# Altium PCB PCB1.PcbDoc
Units mm, origin at the board's own origin, x right, y up, seen from the top; angles counter-clockwise.
Board outline 200 x 100 mm, 2 copper layers (Top Layer, Bottom Layer); 106 components, 53 nets, 297 pads, 37 vias.
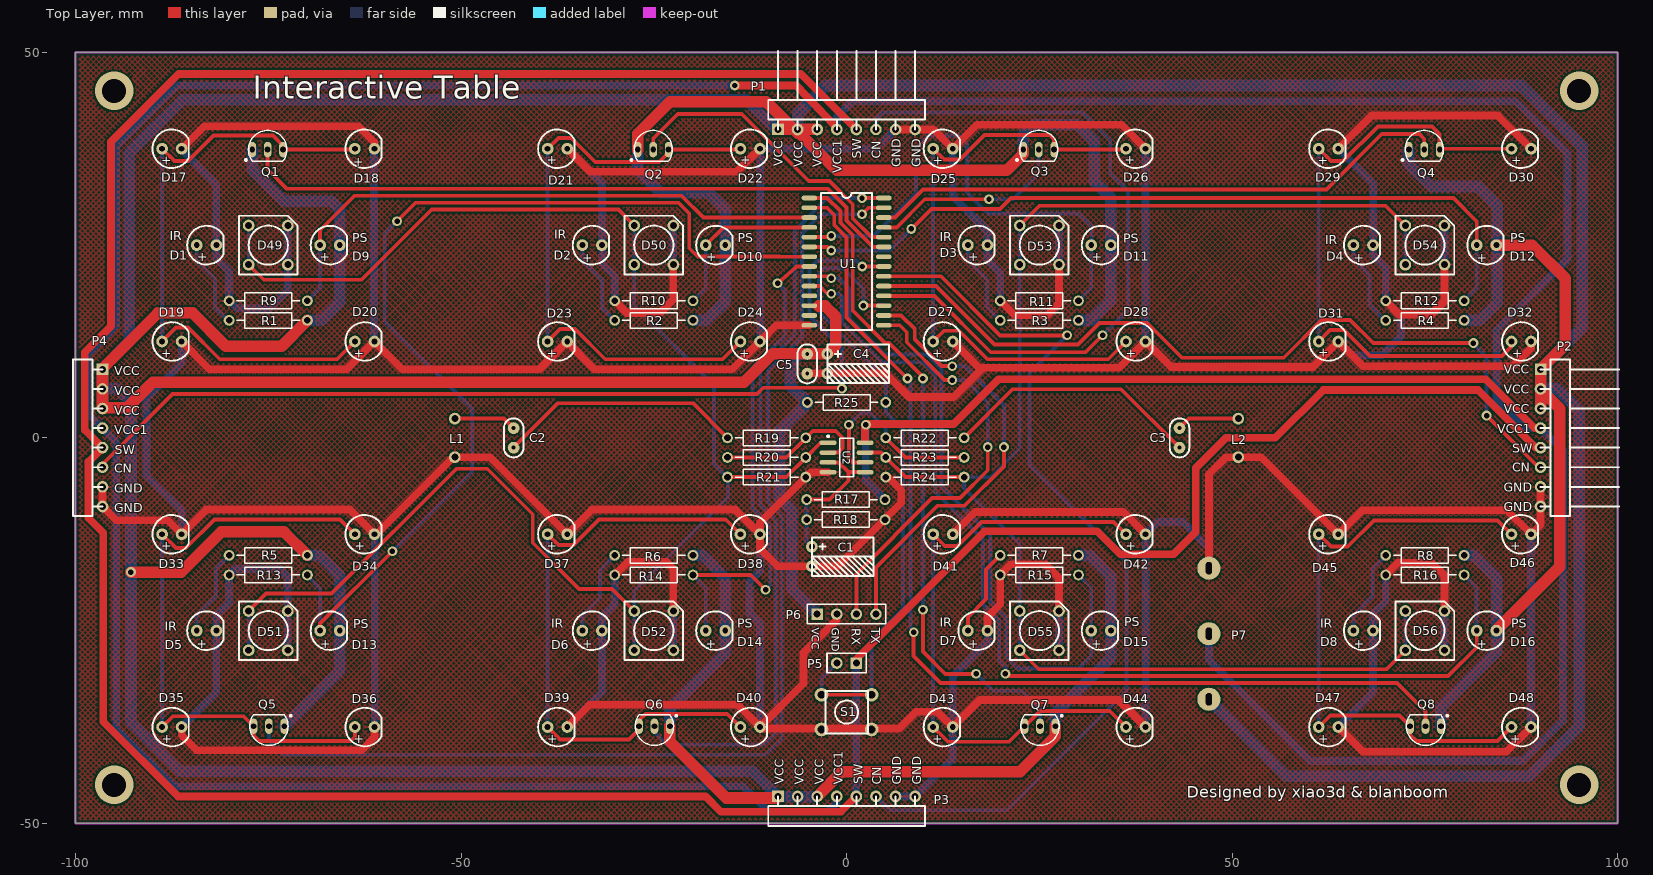
[diagram p0: Top Layer view]
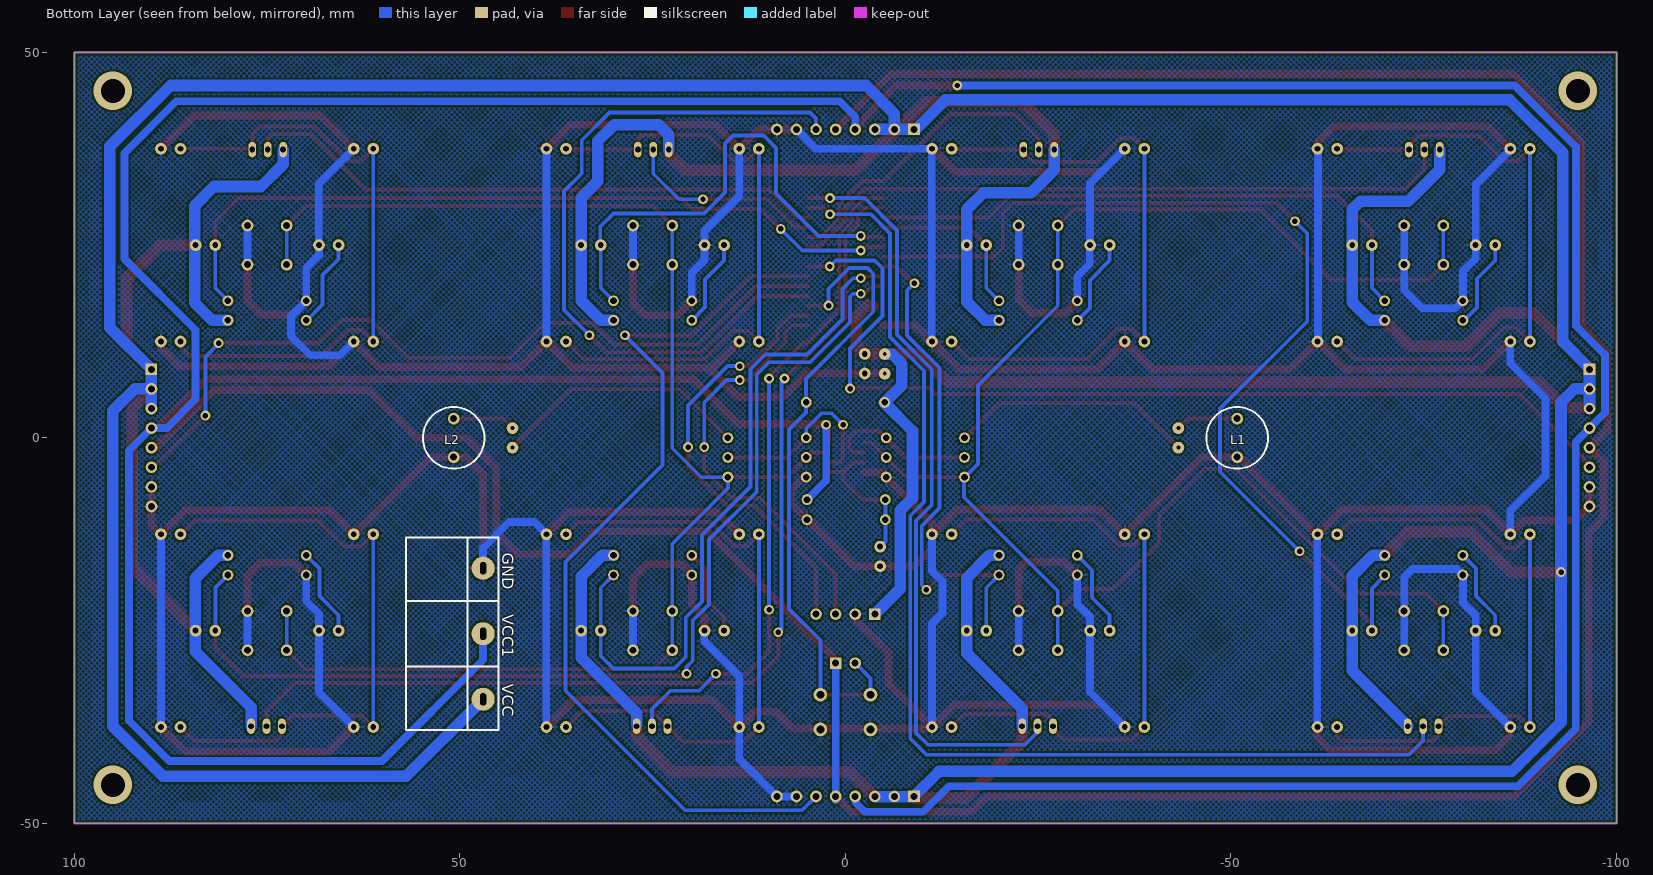
[diagram p1: Bottom Layer view, seen from below]

## Layer stack, top to bottom
Top Layer: signal copper 0.0356
Dielectric: dielectric 0.32, FR-4, Dk 4.8
Bottom Layer: signal copper 0.0356

## Board outline
-100,50 100,50 100,-50 -100,-50 -100,50

## Design rules (kind name [scope] priority, off if disabled: settings)
Clearance [All] p1: gap=0.254
PolygonConnect [All] p1: connectstyle=Relief reliefconductorwidth=0.254 reliefentries=4 polygonreliefangle="90 Angle"
RoutingVias [All] p1: holewidth=0.711 width=1.27 viastyle="Through Hole" minholewidth=0.711 minwidth=1.27 maxholewidth=0.711 maxwidth=1.27
SilkToSilkClearance [All] p1: silktosilkclearance=0
SilkscreenOverComponentPads [All] p1: minsilkscreentomaskgap=0
SolderMaskExpansion [All] p1: expansion=0.102
Width SW [InNet('SW')] p1: maxlimit=1 minlimit=1 preferedwidth=1
Width GND [InNet('GND')] p2: maxlimit=1 minlimit=1 preferedwidth=1
Width VCC1 [InNet('VCC1')] p3: maxlimit=1 minlimit=1 preferedwidth=1
Width VCC [InNet('VCC')] p4: maxlimit=1.5 minlimit=1.5 preferedwidth=1.5
Width [All] p5: maxlimit=0.5 minlimit=0.5 preferedwidth=0.5
26 further rules are at their usual default settings.

## Components (designator, comment, footprint, x,y, rotation, side; value= is the part's Value field where it differs from the comment)
C1 "Cap Pol1" "IECP10 W" -4.5,-15.4 r90 top
C2 "Cap" iCap -43.18,0 r270 top
C3 "Cap" iCap 43.18,0 r270 top
C4 "Cap Pol1" "IECP10 W" -2.5,9.6 r90 top
C5 "Cap" iCap -5.1,9.6 r90 top
D1 "LED0" iLED_IR -83,25 r0 top
D2 "LED0" iLED_IR -33,25 r0 top
D3 "LED0" iLED_IR 17,25 r0 top
D4 "LED0" iLED_IR 67,25 r0 top
D5 "LED0" iLED_IR -83,-25 r0 top
D6 "LED0" iLED_IR -33,-25 r0 top
D7 "LED0" iLED_IR 17,-25 r0 top
D8 "LED0" iLED_IR 67,-25 r0 top
D9 "Photo Sen" iLED_PS -67,25 r0 top
D10 "Photo Sen" iLED_PS -17,25 r0 top
D11 "Photo Sen" iLED_PS 33,25 r0 top
D12 "Photo Sen" iLED_PS 83,25 r0 top
D13 "Photo Sen" iLED_PS -67,-25 r0 top
D14 "Photo Sen" iLED_PS -17,-25 r0 top
D15 "Photo Sen" iLED_PS 33,-25 r0 top
D16 "Photo Sen" iLED_PS 83,-25 r0 top
D17 "LED0" iLED -87.5,37.5 r0 top
D18 "LED0" iLED -62.5,37.5 r0 top
D19 "LED0" iLED -87.5,12.5 r0 top
D20 "LED0" iLED -62.5,12.5 r0 top
D21 "LED0" iLED -37.5,37.5 r0 top
D22 "LED0" iLED -12.5,37.5 r0 top
D23 "LED0" iLED -37.5,12.5 r0 top
D24 "LED0" iLED -12.5,12.5 r0 top
D25 "LED0" iLED 12.5,37.5 r0 top
D26 "LED0" iLED 37.5,37.5 r0 top
D27 "LED0" iLED 12.5,12.5 r0 top
D28 "LED0" iLED 37.5,12.5 r0 top
D29 "LED0" iLED 62.5,37.5 r0 top
D30 "LED0" iLED 87.5,37.5 r0 top
D31 "LED0" iLED 62.5,12.5 r0 top
D32 "LED0" iLED 87.5,12.5 r0 top
D33 "LED0" iLED -87.5,-12.5 r0 top
D34 "LED0" iLED -62.5,-12.5 r0 top
D35 "LED0" iLED -87.5,-37.5 r0 top
D36 "LED0" iLED -62.5,-37.5 r0 top
D37 "LED0" iLED -37.5,-12.5 r0 top
D38 "LED0" iLED -12.5,-12.5 r0 top
D39 "LED0" iLED -37.5,-37.5 r0 top
D40 "LED0" iLED -12.5,-37.5 r0 top
D41 "LED0" iLED 12.5,-12.5 r0 top
D42 "LED0" iLED 37.5,-12.5 r0 top
D43 "LED0" iLED 12.5,-37.5 r0 top
D44 "LED0" iLED 37.5,-37.5 r0 top
D45 "LED0" iLED 62.5,-12.5 r0 top
D46 "LED0" iLED 87.5,-12.5 r0 top
D47 "LED0" iLED 62.5,-37.5 r0 top
D48 "LED0" iLED 87.5,-37.5 r0 top
D49 "led4" LED4 -75,25 r0 top
D50 "led4" LED4 -25,25 r0 top
D51 "led4" LED4 -75,-25 r0 top
D52 "led4" LED4 -25,-25 r0 top
D53 "led4" LED4 25,25 r0 top
D54 "led4" LED4 75,25 r0 top
D55 "led4" LED4 25,-25 r0 top
D56 "led4" LED4 75,-25 r0 top
L1 "Inductor" IL -50.8,0 r90 top
L2 "Inductor" IL 50.8,0 r90 top
P1 "Header 8" HDR1X8H 0,40 r90 top
P2 "Header 8" HDR1X8H 90,0 r0 top
P3 "Header 8" HDR1X8 0,-46.5 r90 top
P4 "Header 8" HDR1X8 -96.5,0 r0 top
P5 "Header 2" HDR1X2 1.27,-29.21 r180 top
P6 "Header 4" HDR1X4 -3.81,-22.86 r0 top
P7 "Header 3" HBX3P 46.99,-25.4 r90 top
Q1 "NPN" NPN -75,37.5 r270 top
Q2 "NPN" NPN -25,37.5 r270 top
Q3 "NPN" NPN 25,37.5 r270 top
Q4 "NPN" NPN 75,37.5 r270 top
Q5 "NPN" NPN -75,-37.5 r90 top
Q6 "NPN" NPN -25,-37.5 r90 top
Q7 "NPN" NPN 25,-37.5 r90 top
Q8 "NPN" NPN 75,-37.5 r90 top
R1 "Res2" AXIAL-0.4 -75,15.24 r0 top
R2 "Res2" AXIAL-0.4 -25,15.24 r0 top
R3 "Res2" AXIAL-0.4 25,15.24 r0 top
R4 "Res2" AXIAL-0.4 75,15.24 r0 top
R5 "Res2" AXIAL-0.4 -75,-15.24 r0 top
R6 "Res2" AXIAL-0.4 -25,-15.24 r0 top
R7 "Res2" AXIAL-0.4 25,-15.24 r0 top
R8 "Res2" AXIAL-0.4 75,-15.24 r0 top
R9 "Res2" AXIAL-0.4 -75,17.78 r0 top
R10 "Res2" AXIAL-0.4 -25,17.78 r0 top
R11 "Res2" AXIAL-0.4 25,17.78 r0 top
R12 "Res2" AXIAL-0.4 75,17.78 r0 top
R13 "Res2" AXIAL-0.4 -75,-17.78 r0 top
R14 "Res2" AXIAL-0.4 -25,-17.78 r0 top
R15 "Res2" AXIAL-0.4 25,-17.78 r0 top
R16 "Res2" AXIAL-0.4 75,-17.78 r0 top
R17 "Res2" AXIAL-0.4 -0.1,-8 r0 top
R18 "Res2" AXIAL-0.4 -0.1,-10.6 r0 top
R19 "Res2" AXIAL-0.4 -10.36,0 r180 top
R20 "Res2" AXIAL-0.4 -10.36,-2.54 r180 top
R21 "Res2" AXIAL-0.4 -10.36,-5.08 r180 top
R22 "Res2" AXIAL-0.4 10.16,0 r180 top
R23 "Res2" AXIAL-0.4 10.16,-2.54 r180 top
R24 "Res2" AXIAL-0.4 10.16,-5.08 r180 top
R25 "Res2" AXIAL-0.4 0,4.6 r180 top
S1 "SW" SW 0,-35.56 r180 top
U1 "STC15F408AD - 35I - SOP28" SOP28 0,22.86 r0 top
U2 "LM358M" M08A_N 0,-2.54 r0 top

## Footprints (in the part's own frame and the unit in brackets; to place one, negate y for a bottom-side part, rotate by r counter-clockwise, add the part's x,y. Pads: shape width x height; smd on the part's side, far side on the other; paste and mask are expansions set on the pad)
AXIAL-0.4 [mm] "Axial Device, Thru-Hole; 2 Leads; 0.4 in Pin Spacing"
  round 1.4 hole 0.85: 1(-5.08,0) 2(5.08,0)
  silkscreen extent -4.06,-1.02 4.06,1.02
HBX3P [mm]
  round 3 hole 0.8 slot 1.6 at 0 deg: 1(-8.5,0) 2(0,0) 3(8.5,0)
HDR1X2 [mm] "Connector; Header; 2 Position"
  rect 1.5x1.5 hole 0.9: 1(0,0)
  round 1.5 hole 0.9: 2(2.54,0)
  silkscreen extent -1.27,-1.27 3.81,1.27
HDR1X4 [mm] "Connector; Header; 4 Position"
  rect 1.5x1.5 hole 0.9: 1(0,0)
  round 1.5 hole 0.9: 2(2.54,0) 3(5.08,0) 4(7.62,0)
  silkscreen extent -1.27,-1.27 8.89,1.27
HDR1X8 [mm]
  rect 1.5x1.5 hole 0.9: 1(0,8.89)
  round 1.5 hole 0.9: 2(0,6.35) 3(0,3.81)
  round 1.524 hole 0.9: 4(0,1.27) 5(0,-1.27) 6(0,-3.81) 7(0,-6.35) 8(0,-8.89)
  silkscreen extent -3.81,-10.16 0,10.16
HDR1X8H [mm]
  rect 1.5x1.5 hole 0.9: 1(0,8.89)
  round 1.524 hole 0.9: 2(0,6.35) 3(0,3.81) 4(0,1.27) 5(0,-1.27) 8(0,-8.89)
  round 1.5 hole 0.9: 6(0,-3.81) 7(0,-6.35)
  silkscreen extent 0,-10.15 10.16,10.16
iCap [mil]
  round 60 hole 19.68: 1(-50,0) 2(50,0)
  silkscreen extent -100,-50 100,50
"IECP10 W" [mil]
  round 60 hole 30: 1(50.79,0) 2(-49.21,0)
  silkscreen extent -98,-315 98,0
IL [mm]
  round 1.524 hole 0.9: 1(-2.5,0) 2(2.5,0)
iLED [mil]
  round 60 hole 30: 1(-50,0) 2(50,0)
  silkscreen extent -98,-98 86,98
iLED_IR [mil]
  round 60 hole 30: 1(-50,0) 2(50,0)
  silkscreen extent -99,-99 86,99
iLED_PS [mil]
  round 60 hole 30: 1(-50,0) 2(50,0)
  silkscreen extent -98,-98 86,98
LED4 [mil]
  round 60 hole 35.43: 1(-100,100) 2(-100,-100) 3(100,100) 4(100,-100)
  silkscreen extent -150,-150 150,150
M08A_N [mm] "SOIC, 8-Leads, Body 4.9x3.9mm, Pitch 1.27mm, IPC Medium Density"
  oval 2.2x0.6 smd: 1(-2.4,1.905) 2(-2.4,0.635) 3(-2.4,-0.635) 4(-2.4,-1.905) 5(2.4,-1.905) 6(2.4,-0.635) 7(2.4,0.635) 8(2.4,1.905)
  silkscreen extent -2.52,-2.5 0.9,2.88, body extent -2,-2.5 2,2.5, height 1.75
NPN [mm]
  oval 2x1 hole 0.76: 1(0.11,-2.08) 2(0.11,-0.08) 3(0.11,1.92)
  silkscreen extent -2.37,-3.03 1.61,2.4, body extent -2.39,-2.58 1.61,2.42, height 6.86
SOP28 [mil] "STC"
  oval 80x24 smd: 1(-190,325) 2(-190,275) 3(-190,225) 4(-190,175) 5(-190,125) 6(-190,75) 7(-190,25) 8(-190,-25) 9(-190,-75) 10(-190,-125) 11(-190,-175) 12(-190,-225) 13(-190,-275) 14(-190,-325) 15(190,-325) 16(190,-275) 17(190,-225) 18(190,-175) 19(190,-125) 20(190,-75) 21(190,-25) 22(190,25) 23(190,75) 24(190,125) 25(190,175) 26(190,225) 27(190,275) 28(190,325)
  silkscreen extent -130,-350 130,350
SW [mil]
  round 70 hole 40: 1(-127.95,88.58) 1(127.95,88.58) 2(-127.95,-88.58) 2(127.95,-88.58)
  silkscreen extent -108,-108 108,108

## Part data
C1 C4: "Polarized Capacitor (Radial)"
C2 C3 C5: "Capacitor"
D1 D2 D3 D4 D5 D6 D7 D8 D17 D18 D19 D20 D21 D22 D23 D24 D25 D26 D27 D28 D29 D30 D31 D32 D33 D34 D35 D36 D37 D38 D39 D40 D41 D42 D43 D44 D45 D46 D47 D48: "Typical INFRARED GaAs LED"
D9 D10 D11 D12 D13 D14 D15 D16: "Photosensitive Diode"
P1 P2 P3 P4: "Header, 8-Pin"
P5: "Header, 2-Pin"
P6: "Header, 4-Pin"
P7: "Header, 3-Pin"
Q1 Q2 Q3 Q4 Q5 Q6 Q7 Q8: "NPN Bipolar Transistor"
R1 R2 R3 R4 R5 R6 R7 R8 R9 R10 R11 R12 R13 R14 R15 R16 R17 R18 R19 R20 R21 R22 R23 R24 R25: "Resistor"
S1: library part 微动开关
U2: "Low Power Dual Operational Amplifier"

## Via types
v1: diameter 1.27, hole 0.711, Top Layer to Bottom Layer, 33 vias
v2: diameter 5, hole 3.1, Top Layer to Bottom Layer, 4 vias

## Nets (pads, with @x,y where several pads share a name; then routed paths per layer and width w, separated by ;. In a path a pad name is that pad's centre, name@x,y a point inside that pad or via, vN(x,y) a via of type N, cw(c..) or ccw(c..) an arc to the next point about the centre after c; other vN are vias at no path point)
GND: C1.2 C4.2 C5.1 D1.2 D2.2 D3.2 D4.2 D5.2 D6.2 D7.2 D8.2 D17.2 D18.2 D19.2 D20.2 D21.2 D22.2 D23.2 D24.2 D25.2 D26.2 D27.2 D28.2 D29.2 D30.2 D31.2 D32.2 D33.2 D34.2 D35.2 D36.2 D37.2 D38.2 D39.2 D40.2 D41.2 D42.2 D43.2 D44.2 D45.2 D46.2 D47.2 D48.2 D49.3 D49.4 D50.3 D50.4 D51.3 D51.4 D52.3 D52.4 D53.3 D53.4 D54.3 D54.4 D55.3 D55.4 D56.3 D56.4 L1.1 L2.1 P1.7 P1.8 P2.7 P2.8 P3.7 P3.8 P4.7 P4.8 P6.2 P7.3 R9.1 R10.1 R11.1 R12.1 R13.1 R14.1 R15.1 R16.1 R18.2 R21.1 R24.2 S1.1 U1.14 U2.4 | length 1310
  Top Layer w1: P4.7 P4.8 -94.69,-10.7 -88.03,-10.7 D33.2 -83.03,-9.3 -64.4,-9.3 -61.23,-12.47 D34.2 -61.115,-12.615 -51,-2.5 L1.1 -46.23,-2.5 D37.2 -33.03,-9.3 -14.43,-9.3 D38.2 ; D35.2 -86.23,-38.57 -84.3,-40.5 -62.9,-40.5 -61.23,-38.83 D36.2 ; D19.2 -82.63,8.9 -64.83,8.9 D20.2 -57.63,8.9 -39.83,8.9 D23.2 -36.23,12.43 -32.7,8.9 -14.83,8.9 D24.2 -9.125,14.605 U1.14 ; D17.2 -86.2,37.5 -83.3,40.4 -63.3,40.4 -61.23,38.33 D18.2 ; D39.2 -33.33,-34.6 -14.13,-34.6 D40.2 ; D21.2 -33.23,34.5 -14.23,34.5 D22.2 ; R14.1 -28.4,-16.1 -23.32,-16.1 -22.46,-16.96 D52.3 ; R10.1 -28.5,16.2 -24.2,16.2 -22.46,17.94 D50.4 ; C5.1@-5.1,8.4 5,8.4 8.1,5.3 13.9,5.3 17.435,8.835 ; U2.4 -4.645,-4.445 R21.1 -11.23,-11.03 D38.2 ; P6.2 -1.27,-23.57 -5.6,-27.9 -5.6,-31.87 D40.2 ; R24.2 5.38,-5.08 7.1,-6.8 7.1,-8.4 -1.15,-16.65 C1.2 -8.95,-16.65 -11.23,-14.37 D38.2 ; P1.7 P1.8 11.27,40 D25.2 16.87,40.6 35.67,40.6 D26.2 ; D41.2 16.67,-9.6 35.87,-9.6 D42.2 ; D27.2 17.17,9.1 35.37,9.1 D28.2 42.07,9.2 60.5,9.2 63.77,12.47 D31.2 66.97,9.3 86.4,9.3 88.77,11.67 D32.2 ; D7.2 18.27,-23.23 19.92,-21.58 R15.1 21.3,-16.4 25.8,-16.4 27.54,-18.14 D55.3 ; R11.1 21.8,15.9 26,15.9 27.54,17.44 D53.4 ; D44.2 35.27,-34 17.27,-34 D43.2 11.77,-35.5 9,-35.5 6.8,-37.7 -11.03,-37.7 D40.2 ; P7.3@46.99,-17.11 46.99,-4.71 49.2,-2.5 53.77,-2.5 D45.2 66.9,-9.37 85.64,-9.37 D46.2 90,-11.27 P2.8 P2.7 ; D47.2 66.97,-40.7 85.57,-40.7 D48.2 ; D29.2 68.07,41.8 84.47,41.8 D30.2 ; R16.1 71.5,-16.2 75.9,-16.2 77.54,-17.84 D56.3 ; R12.1 71.7,16 75.8,16 77.54,17.74 D54.4
  Bottom Layer w1: D17.2@-86.3,37.43 -81.73,32.86 D1.2 -81.73,23.23 -80.08,21.58 R9.1 -79.1,16.8 -74.8,16.8 -72.46,19.14 D49.4 D49.3 ; D35.2 -81.73,-33 -81.73,-23.03 -80.08,-21.38 R13.1 -79.3,-17 -73.5,-17 -72.46,-18.04 D51.3 D51.4 ; D33.2 -86.23,-9.47 -90.8,-4.9 -90.8,-4.5 -90.8,5.1 -86.23,9.67 D19.2 ; D36.2 -61.2,-37.47 -61.2,-12.53 D34.2 ; D20.2 -61.3,12.57 -61.3,37.43 D18.2 ; D39.2 -31.73,-33 -31.73,-23.23 -30.08,-21.58 R14.1 ; D21.2 -31.73,33 D2.2 ; D2.2@-31.7,24.8 -31.7,22.6 -30.08,20.98 R10.1 ; D52.4 D52.3 ; D50.4 D50.3 ; D40.2 -11.23,-24.07 -12.6,-22.7 -12.6,-18.67 -11.23,-17.3 D38.2 ; D24.2 -11.2,12.53 -11.2,37.47 D22.2 3.85,37.5 P1.7 ; P3.7 P3.8 13.77,-41.62 D43.2 13.77,-30.93 18.3,-26.4 D7.2@18.3,-25 ; D25.2 13.77,31.33 18.27,26.83 D3.2 18.27,23.03 19.92,21.38 R11.1 ; D55.4 D55.3 ; D53.4 D53.3 ; D44.2 38.8,-37.47 38.8,-12.53 D42.2 40.37,-10.9 43.6,-10.9 46.99,-14.29 P7.3 ; D28.2 D26.2 ; D47.2 68.27,-33 68.27,-22.83 69.92,-21.18 R16.1 ; D31.2 65.57,10.7 69.4,10.7 71.9,13.2 71.9,15.8 R12.1 69.92,22.08 68.27,23.73 D4.2 ; D29.2 68.3,32.97 D4.2@68.3,25 ; D56.4 D56.3 ; D54.4 D54.3 ; D48.2 D46.2 ; D32.2 D32.2@88.8,12.53 ; D30.2 D30.2@88.8,37.47
NetC1_1: C1.1 R17.1 R18.1 U2.3 U2.5 | length 19.3
  Top Layer w0.5: R17.1 -2.2,-8 0.245,-5.555 0.245,-4.445 ; U2.3 -1.025,-3.175 0.245,-4.445 ; U2.5 0.245,-4.445
  Bottom Layer w0.5: R17.1 -5.18,-13.43 C1.1
NetC2_1: C2.1 L1.2 | length 8.1
  Top Layer w0.5: L1.2 -44.41,2.5 C2.1
NetC2_2: C2.2 R19.2 | length 32
  Top Layer w0.5: C2.2 -37.41,4.5 -19.94,4.5 R19.2
NetC3_1: C3.1 L2.2 | length 8.1
  Top Layer w0.5: C3.1 44.41,2.5 L2.2
NetC3_2: C3.2 R22.1 | length 33.7
  Top Layer w0.5: R22.1 21.54,6.3 35.61,6.3 C3.2
NetD1_1: D1.1 R1.1 | length 11.6
  Top Layer w0.5: R1.1@-80.24,15.24 R1.1
  Bottom Layer w0.5: D1.1 -84.27,23 -81.9,20.63 -81.9,16.9 R1.1@-80.24,15.24
NetD2_1: D2.1 R2.1 | length 11.5
  Bottom Layer w0.5: D2.1 -34.27,23 -31.7,20.43 -31.7,16.86 R2.1
NetD3_1: D3.1 R3.1 | length 11.5
  Bottom Layer w0.5: D3.1 15.73,23 18.2,20.53 18.2,16.96 R3.1
NetD4_1: D4.1 R4.1 | length 11.5
  Bottom Layer w0.5: D4.1 65.73,23.17 67.8,21.1 67.8,17.3 69.86,15.24 R4.1
NetD5_1: D5.1 R5.1 | length 11.5
  Bottom Layer w0.5: D5.1 -84.27,-23 -81.8,-20.53 -81.8,-16.96 R5.1
NetD6_1: D6.1 R6.1 | length 11.5
  Bottom Layer w0.5: D6.1 -34.27,-23 -32,-20.73 -32,-17.16 R6.1
NetD7_1: D7.1 R7.1 | length 11.5
  Top Layer w0.5: D7.1 15.73,-23.27 18.1,-20.9 18.1,-17.06 R7.1
NetD8_1: D8.1 R8.1 | length 11.5
  Bottom Layer w0.5: D8.1 65.73,-23 68.2,-20.53 68.2,-16.96 R8.1
NetD9_1: D9.1 R9.2 U1.3 | length 76.3
  Top Layer w0.5: D9.1 -68.27,26.93 -63.8,31.4 -21.4,31.4 -18.575,28.575 U1.3
  Bottom Layer w0.5: R9.2 -68.27,19.43 D9.1
NetD10_1: D10.1 R10.2 U1.4 | length 22.3
  Top Layer w0.5: D10.1 -15.965,27.305 U1.4
  Bottom Layer w0.5: R10.2 -18.27,19.43 D10.1
NetD11_1: D11.1 R11.2 U1.5 | length 64.4
  Top Layer w0.5: U1.5 -2.165,26.035 v1(-2,26.2)
  Bottom Layer w0.5: v1@-1.97,26.2 3.5,26.2 9,31.7 9,37.6 10.6,39.2 14.6,39.2 15.6,38.2 15.6,31.8 18.3,29.1 30.1,29.1 31.8,27.4 D11.1@31.8,25 ; R11.2 31.73,19.43 D11.1
NetD12_1: D12.1 R12.2 U1.6 | length 101.8
  Top Layer w0.5: U1.6 -2.465,24.765 v1(-2,24.3) ; v1(8.4,27.1) 11,29.7 19.9,29.7 21.3,31.1 78.7,31.1 81.73,28.07 D12.1
  Bottom Layer w0.5: v1(-2,24.3) 5.6,24.3 v1(8.4,27.1) ; R12.2 81.73,19.43 D12.1
NetD13_1: D13.1 R13.2 U1.7 | length 134.5
  Top Layer w0.5: R13.2@-69.92,-17.88 R13.2 ; D13.1 -68.27,-24.07 v1(-58.9,-14.7) ; v1(-58.3,28.1) -55.9,30.5 -21.8,30.5 -20.4,29.1 -20.4,24.6 -19.3,23.5 -8.71,23.5 -8.705,23.495 U1.7
  Bottom Layer w0.5: R13.2@-69.92,-17.88 -68.27,-19.53 D13.1 ; v1(-58.9,-14.7) -48.6,-4.4 -48.6,3.8 -59.9,15.1 -59.9,26.5 v1(-58.3,28.1)
NetD14_1: D14.1 R14.2 U1.8 | length 66.1
  Top Layer w0.5: R14.2 -12.42,-17.78 v1(-10.5,-19.7) ; v1@-8.945,20.052 -6.475,22.225 U1.8
  Bottom Layer w0.5: R14.2 -18.27,-19.43 D14.1 ; v1(-10.5,-19.7) -9.908,-19.108 -9.908,-11.392 -12.2,-9.1 -12.2,9.1 -8,13.3 -8,19.1 v1(-8.95,20.05)
NetD15_1: D15.1 R15.2 U1.9 | length 88.7
  Top Layer w0.5: U1.9 -2.255,20.955 v1(-2,20.7)
  Bottom Layer w0.5: v1(-2,20.7) -1,20.7 0.4,19.3 0.4,15.4 5,10.8 10.4,10.8 12.3,8.9 12.3,-6.3 18.6,-12.6 18.6,-21.2 20.7,-23.3 20.7,-28.4 22.2,-29.9 30.1,-29.9 31.73,-28.27 D15.1 31.73,-19.43 R15.2
NetD16_1: D16.1 R16.2 U1.10 | length 138.5
  Top Layer w0.5: U1.10 -3.485,19.685 -2.5,18.7 v1(-2,18.7) ; v1(20.6,-30.6) 20.9,-30.6 21.2,-30.9 78,-30.9 81.73,-27.17 D16.1
  Bottom Layer w0.5: v1(-2,18.7) -1,18.7 -0.6,18.3 -0.6,15 4.6,9.8 9.9,9.8 11.5,8.2 11.5,-7 17.7,-13.2 17.7,-21.6 19.8,-23.7 19.8,-28.9 20.6,-29.7 v1(20.6,-30.6) ; R16.2 81.7,-19.4 81.7,-24.78 D16.1@81.48,-25
NetD17_1: D17.1 D18.1 D19.1 D20.1 Q1.3 | length 81.5
  Top Layer w0.5: D19.1 -86.97,14.3 -85.4,14.3 -81.3,10.2 -66.07,10.2 D20.1 ; D17.1 -87.17,35.9 -85.4,35.9 -82.1,39.2 -74.4,39.2 -73.08,37.88 Q1.3 ; Q1.3@-72.99,37.3 Q1.3 ; D18.1@-63.88,37.39 Q1.3
  Bottom Layer w0.5: D19.1 D17.1
NetD21_1: D21.1 D22.1 D23.1 D24.1 Q2.3 | length 80.6
  Top Layer w0.5: D23.1 -37.17,14.1 -35.2,14.1 -31.3,10.2 -16.07,10.2 D24.1 ; D21.1 -37.37,38.9 -35.7,38.9 -32.6,35.8 -24.3,35.8 -22.71,37.39 D22.1@-13.88,37.39
  Bottom Layer w0.5: D23.1 D21.1
NetD25_1: D25.1 D26.1 D27.1 D28.1 Q3.3 | length 81.5
  Top Layer w0.5: D27.1 12.63,13.9 14.6,13.9 18.296,10.204 33.934,10.204 D28.1 ; D25.1 12.63,36.1 14.7,36.1 17.9,39.3 26.4,39.3 26.92,38.78 Q3.3 D26.1@36.12,37.39
  Bottom Layer w0.5: D27.1 D25.1
NetD29_1: D29.1 D30.1 D31.1 D32.1 Q4.3 | length 82.2
  Top Layer w0.5: D31.1 62.7,13.97 64.53,13.97 67.9,10.6 85,10.6 86.17,11.77 D32.1@86.17,12.44 ; D29.1 62.83,35.9 64.4,35.9 68.9,40.4 75.9,40.4 76.9,39.4 Q4.3@76.9,38.225 ; Q4.3@76.92,37.5 D30.1
  Bottom Layer w0.5: D31.1 D29.1
NetD33_1: D33.1 D34.1 D35.1 D36.1 Q5.3 | length 82.2
  Top Layer w0.5: D35.1 -87.37,-36.1 -78.21,-36.1 Q5.3 -76.92,-38.58 -76.2,-39.3 -64.3,-39.3 -63.77,-38.77 D36.1 ; D33.1 -86.97,-14.3 -85.7,-14.3 -81.97,-10.57 -65.7,-10.57 D34.1
  Bottom Layer w0.5: D35.1 D33.1
NetD37_1: D37.1 D38.1 D39.1 D40.1 Q6.3 | length 81.2
  Top Layer w0.5: D39.1 -37.17,-39.1 -28.2,-39.1 -26.92,-37.82 -26.92,-36.62 -26.1,-35.8 -15.47,-35.8 D40.1 ; D37.1 -37.37,-13.9 -35.4,-13.9 -32.1,-10.6 -15.67,-10.6 D38.1
  Bottom Layer w0.5: D39.1 D37.1
NetD41_1: D41.1 D42.1 D43.1 D44.1 Q7.3 | length 80.9
  Top Layer w0.5: D43.1 13.13,-39.4 21.07,-39.4 25.07,-35.4 34.13,-35.4 D44.1 ; D41.1 12.73,-14 14.4,-14 17.5,-10.9 34.63,-10.9 D42.1
  Bottom Layer w0.5: D43.1 D41.1
NetD45_1: D45.1 D46.1 D47.1 D48.1 Q8.3 | length 81.2
  Top Layer w0.5: D47.1 62.73,-36 71.69,-36 73.1,-37.41 73.1,-38.5 73.9,-39.3 84.43,-39.3 D48.1 ; D45.1 62.83,-14.1 65,-14.1 68.4,-10.7 84.43,-10.7 D46.1
  Bottom Layer w0.5: D47.1 D45.1
NetD49_1: D49.1 D49.2 D50.1 D50.2 D51.1 D51.2 D52.1 D52.2 R20.1 R21.2 U2.1 | length 213.1
  Top Layer w0.5: D51.1 -75.28,-20.2 -66.8,-20.2 -50.6,-4 -46.6,-4 -40.7,-9.9 -40.7,-13.6 -34.7,-19.6 -30.4,-19.6 D52.1 ; D49.2 -75.58,20.5 -62.9,20.5 -53.8,29.6 -29.6,29.6 D50.1 ; R21.2 -7.82,-5.08 R20.1 -3.375,-0.635 U2.1
  Bottom Layer w0.5: D51.2 D51.1 ; D49.2 D49.1 ; D52.2 D52.1 -27.54,-19.84 -15.4,-7.7 -15.4,-5.28 -15.44,-5.24 -15.44,-5.16 -17.2,-3.4 -17.2,6.8 -27.54,17.14 D50.2 D50.1
NetD53_1: D53.1 D53.2 D54.1 D54.2 D55.1 D55.2 D56.1 D56.2 R23.2 R24.1 U2.7 | length 191.6
  Top Layer w0.5: U2.7 4.445,-1.905 R23.2 7.62,-5.08 R24.1 ; D53.1@22.45,27.55 25,30.1 69.9,30.1 D54.1 ; D55.2 24.92,-30 70,-30 D56.2
  Bottom Layer w0.5: D55.2 D55.1 22.46,-13.76 15.24,-6.54 15.24,-5.1 18.7,-5.1 22.46,-1.34 D53.2 D53.1 ; D56.2 D56.1 ; D54.2 D54.1
NetQ1_2: Q1.2 U1.23 | length 87.6
  Top Layer w0.5: Q1.2 -75.08,34.83 -72.55,32.3 -2.4,32.3 0,29.9 0,28.2 3.435,24.765 U1.23
NetQ2_2: Q2.2 U1.24 | length 40.3
  Top Layer w0.5: Q2.2 -25.08,38.82 -21.9,42 -13.6,42 -4.9,33.3 -2.2,33.3 0.8,30.3 0.8,28.466 3.231,26.035 U1.24
NetQ3_2: Q3.2 U1.25 | length 26.1
  Top Layer w0.5: U1.25 6.505,27.305 10.14,30.94 v1(18.47,30.94)
  Bottom Layer w0.5: v1(18.47,30.94) 21.6,30.94 24.92,34.26 Q3.2
NetQ4_2: Q4.2 U1.26 | length 76.2
  Top Layer w0.5: U1.26 6.275,28.575 9.92,32.22 62.22,32.22 69.4,39.4 74.3,39.4 74.92,38.78 Q4.2
NetQ5_2: Q5.2 U1.27 | length 150.1
  Top Layer w0.5: v1(2,29) 2.845,29.845 U1.27
  Bottom Layer w0.5: Q5.2 -74.92,-39.28 -73.1,-41.1 -10.5,-41.1 -8.4,-39 -8.4,-10.1 -10.2,-8.3 -10.2,8.7 -5.8,13.1 -5.8,26.5 -3.3,29 v1(2,29)
NetQ6_2: Q6.2 U1.28 | length 99
  Top Layer w0.5: v1@2,31.115 U1.28
  Bottom Layer w0.5: Q6.2 -24.92,-38.18 -23.3,-39.8 -10.7,-39.8 -9.154,-38.254 -9.154,-10.746 -11.2,-8.7 -11.2,8.9 -6.7,13.4 -6.7,26.9 -2.5,31.1 v1(2,31.1)
NetQ7_2: Q7.2 U1.1 | length 86.8
  Top Layer w0.5: U1.1 -2.515,31.115 -0.8,29.4 -0.8,27.9 0.8,26.3 0.8,16.5 5,12.3 5.5,12.3 v1@9.9,7.9 ; v1(9.9,-22.3) 9.9,-27.7 12.8,-30.6 v1(16.8,-30.6)
  Bottom Layer w0.5: v1(9.9,-22.3) v1(9.9,7.7) ; v1(16.8,-30.6) 16.8,-30.7 16.9,-30.7 19,-32.8 22.7,-32.8 25.08,-35.18 Q7.2@25.08,-37.28
NetQ8_2: Q8.2 U1.2 | length 137.4
  Top Layer w0.5: U1.2 -2.545,29.845 -1.6,28.9 -1.6,27.6 0,26 0,15.6 7.6,8 7.6,7.7 v1(7.9,7.7) 7.8,7.7 7.7,7.6 v1@7.7,7.4 ; v1(8.7,-25.2) 8.7,-28.3 12.2,-31.8 71.4,-31.8 75.08,-35.48 Q8.2
  Bottom Layer w0.5: v1@7.7,7.4 7.7,7.6 v1@7.8,7.7 ; v1(7.9,7.7) v1@7.8,7.7 ; v1(8.7,-25.2) 8.3,-24.8 8.3,7.2 v1@7.8,7.7
NetR19_1: R19.1 R20.2 U2.2 | length 20.3
  Top Layer w0.5: R20.2 -7.82,-2.54 R19.1 -4.38,0.9 -1.4,0.9 -0.5,0 -0.5,-1.3 -1.105,-1.905 U2.2
  Bottom Layer w0.5: R19.1 R19.1@-5.18,0.1
NetR22_2: R22.2 R23.1 U2.6 | length 25.3
  Top Layer w0.5: v1@0.3,1.6 0.3,-2.7 0.775,-3.175 U2.6 ; R22.2 7.62,-2.54 R23.1
  Bottom Layer w0.5: v1(0.3,1.7) 1.8,3.2 3.1,3.2 5.08,1.22 R22.2
P3.0: P6.3 U1.15 | length 55
  Top Layer w0.5: P6.3 1.27,-17.63 11.1,-7.8 14.7,-7.8 18.3,-4.2 v1(18.3,-1.2) ; U1.15 6.895,14.605 7.8,13.7 7.8,12.4 12.7,7.5 v1(13.7,7.5)
  Bottom Layer w0.5: v1(13.7,7.5) 15.4,7.5 18.3,4.6 v1(18.3,-1.2)
P3.1: P6.4 U1.16 | length 57.2
  Top Layer w0.5: P6.4 3.81,-16.79 11.8,-8.8 15.3,-8.8 20.4,-3.7 v1(20.4,-1.2) ; U1.16 7.075,15.875 8.85,14.1 8.85,12.75 12.3,9.3 v1(13.7,9.3)
  Bottom Layer w0.5: v1(13.7,9.3) 15.3,9.3 20.4,4.2 v1(20.4,-1.2)
P3.2: P5.2 R25.1 S1.2 U1.17 | length 84.3
  Top Layer w0.5: S1.2@-3.25,-33.31 S1.2@3.25,-33.31 ; v1@2.18,17.145 U1.17
  Bottom Layer w0.5: S1.2@-3.25,-33.31 -3.25,-31.19 P5.2 ; v1(2.18,17.15) 2.18,19.34 -0.5,22.02 -2.88,22.02 -3.61,21.29 -3.61,16.35 5.1,7.64 5.1,3.3 7.3,1.1 7.3,-22.2 3.25,-26.25 S1.2@3.25,-33.31
P3.3: P1.6 U1.18 | length 93.6
  Top Layer w0.5: U1.18 11.385,18.415 18.7,11.1 31,11.1 v1(33.203,13.303)
  Bottom Layer w0.5: P1.6 3.81,41.41 4.6,42.2 30.6,42.2 34.2,38.6 34.2,34.3 36.5,32 36.5,16.6 v1(33.203,13.303)
P3.4: P2.6 U1.19 | length 105.8
  Top Layer w0.5: U1.19 11.615,19.685 19.2,12.1 30,12.1 32.8,14.9 39,14.9 43.5,10.4 56.7,10.4 61.6,15.3 65.3,15.3 68.3,12.3 v1(81.3,12.3) ; v1(83,2.9) 89.71,-3.81 P2.6
  Bottom Layer w0.5: v1(81.3,12.3) 81.3,12.2 83,10.5 v1(83,2.9)
P3.5: P3.6 U1.20 | length 119.9
  Top Layer w0.5: U1.20 12.245,20.955 19.9,13.3 v1(28.6,13.3)
  Bottom Layer w0.5: P3.6 5.61,-48.3 20.8,-48.3 36.3,-32.8 36.3,-16.1 23.7,-3.5 23.7,8.4 v1(28.6,13.3)
P3.6: P4.6 U1.21 | length 128.5
  Top Layer w0.5: P4.6@-96.91,-3.81 -87.4,5.7 -11.6,5.7 -10.8,6.5 -0.8,6.5 v1@-0.6,6.3 ; P4.6 P4.6@-96.41,-3.81 ; v1(2.025,22.225) U1.21
  Bottom Layer w0.5: v1(-0.6,6.4) -0.6,11.6 -4.8,15.8 -4.8,22 -3.8,23 1.25,23 v1(2.025,22.225)
P3.7: U1.22
SW: P1.5 P2.5 P3.5 P4.5 P5.1 | length 417.6
  Top Layer w1: P3.5 -0.73,-48.5 -16.3,-48.5 -18.3,-46.5 -86.7,-46.5 -96.4,-36.8 -96.4,-12.3 -98.3,-10.4 -98.3,-3.07 P4.5 -98.8,1.03 -98.8,11.1 -95.4,14.5 -95.4,38.4 -86.6,47.2 -5.93,47.2 P1.5 ; P5.1 1.27,-28.73 5.9,-24.1 17.9,-12.1 32.5,-12.1 35.5,-15.1 42.4,-15.1 45.3,-12.2 45.3,-3.9 49.2,0 55.6,0 61.8,6.2 81.9,6.2 89.37,-1.27 P2.5
  Bottom Layer w1: P3.5@1.27,-47 P5.1
VCC: C4.1 C5.2 D9.2 D10.2 D11.2 D12.2 D13.2 D14.2 D15.2 D16.2 P1.1 P1.2 P1.3 P2.1 P2.2 P2.3 P3.1 P3.2 P3.3 P4.1 P4.2 P4.3 P6.1 P7.1 Q1.1 Q2.1 Q3.1 Q4.1 Q5.1 Q6.1 Q7.1 Q8.1 R1.2 R2.2 R3.2 R4.2 R5.2 R6.2 R7.2 R8.2 R25.2 U1.12 | length 1156.7
  Top Layer w1.5: -93.3,3.9 -90.3,6.9 ; v1(-92.804,-17.4) -86.3,-17.4 -81.1,-12.2 -72.96,-12.2 R5.2 ; -92.8,3.9 -96.41,3.9 P4.3 P4.2 -96.5,9 -89.3,16.2 -84.8,16.2 -80.5,11.9 -73.26,11.9 R1.2 ; -90,7.2 -13.3,7.2 -9.6,10.9 -2.5,10.9 -1.4,12 -1.4,15.7 -2.8,17.1 -3.603,17.1 ; Q2.1 -27.08,39.42 -22.9,43.6 -10.4,43.6 -6.3,39.5 -6.3,40 P1.2 P1.3 ; Q6.1 -22.92,-39.38 -15.6,-46.7 -9.09,-46.7 P3.1 ; P1.1 -6.6,40 -1.3,34.7 20.8,34.7 22.92,36.82 Q3.1 ; P3.3 -0.61,-43.3 22.5,-43.3 27.08,-38.72 Q7.1 ; D12.2@84.2,25 88.9,25 93.2,20.7 93.2,12.09 P2.1 P2.2 P2.2@90,6.3 ; D16.2@84.235,-24.965 92.5,-16.7 92.5,3.8 P2.2@90,6.3 ; P2.3 P2.2@90,6.3
  Bottom Layer w1.5: P4.3 P4.2 ; Q1.1 -77.08,34.78 -73,30.7 -66.8,30.7 -65.73,29.63 -65.73,17.57 -68.06,15.24 R1.2 ; Q5.1 -65.73,-30.2 -65.73,-17.87 -68.36,-15.24 R5.2 ; Q2.1 -27.08,34.78 -24.1,31.8 -17.9,31.8 -15.73,29.63 -15.73,17.67 -18.16,15.24 R2.2 ; Q6.1 -22.92,-35.12 -15.73,-27.93 -15.73,-18.17 -18.66,-15.24 R6.2 ; P1.2 -6.35,42.05 -2.7,45.7 87.5,45.7 95.4,37.8 95.4,14.29 P2.1 P2.2 ; C5.2 -6.03,10.87 -7.3,9.6 -7.3,6.8 -5.05,4.55 -8.7,0.9 -8.7,-7.8 -7.1,-9.4 -7.1,-19.57 P6.1 ; P3.3@-3.85,-46.54 -3.86,-46.55 -8.84,-46.55 -12.13,-43.26 -86.44,-43.26 -92.804,-36.896 -92.804,-3.777 -92.8,-3.773 -92.8,4.6 -94.55,6.35 P4.2 ; P1.3 -9.11,40 -12.94,43.83 -86.17,43.83 -93.01,36.99 -93.01,12.49 -96.5,9 P4.2 ; Q3.1 22.92,39.32 24.2,40.6 30,40.6 32.1,38.5 32.1,33.3 34.27,31.13 34.27,17.77 31.74,15.24 R3.2 ; Q7.1@27.08,-37.12 27.08,-35.72 34.27,-28.53 34.27,-17.97 31.54,-15.24 R7.2 ; P7.1 56.99,-43.9 88.5,-43.9 95,-37.4 95,3.5 92.15,6.35 P2.2 ; Q4.1 72.92,35.48 75.8,32.6 81.9,32.6 84.4,30.1 84.4,17.5 82.14,15.24 R4.2 ; Q8.1 77.08,-34.92 84.3,-27.7 84.3,-18.2 81.34,-15.24 R8.2 ; P2.3 P2.2
VCC1: P1.4 P2.4 P3.4 P4.4 P7.2 R17.2 U2.8 | length 621.4
  Top Layer w1: v1(-14.5,45.7) -6.55,45.7 P1.4@-1.27,40.22 ; U2.8@2.4,-0.4 v1@2.4,1.7 ; v1@2.5,1.8 13.9,1.8 19.7,7.6 82.9,7.6 89.23,1.27 P2.4
  Bottom Layer w1: v1@-14.4,45.7 -86.8,45.7 -94.74,37.76 -94.74,14.56 -98.5,10.8 -98.5,9.517 -98.504,9.513 -98.504,8.267 -98.5,8.263 -98.5,3.27 P4.4 -94.7,-0.53 -94.7,-37.7 -87.23,-45.17 -13.43,-45.17 -10.1,-48.5 -2.5,-48.5 -1.27,-47.27 P3.4 ; P1.4 -1.27,41.63 0.74,43.64 86.76,43.64 93.5,36.9 93.5,23.2 84.3,14 84.3,5 88.03,1.27 P2.4 92.9,-1.63 92.9,-36.7 87.7,-41.9 60.1,-41.9 46.99,-28.79 P7.2 ; v1(2.5,1.7) 2.5,-5.52 R17.2
pads on no net: U1.11 U1.13
copper on no net:
  other v2: -95,-45 95,-45 -95,45 95,45

## Polygon pours and split planes (outlines as drawn)
GND on Bottom Layer "Top Layer-No Net" (hatched 45Degree grid 0.508 track 0.203, pour order 1001): -100,50 100,50 100,-50 -100,-50
GND on Top Layer "Top Layer-No Net" (hatched 45Degree grid 0.508 track 0.203): -100,50 100,50 100,-50 -100,-50

## Keep-outs
Keep-Out Layer:
  the board outline again, w0.254

## Silkscreen, mask and mechanical layers (free items; w line width, h text height)
Top Overlay:
  text "Interactive Table" at -77,44 h3
  text "VCC" at -4.5,-24.6 h1 r270
  text "GND" at -1.9,-24.6 h1 r270
  text "TX" at 3.2,-24.6 h1.2 r270
  text "RX" at 0.7,-24.7 h1.2 r270
  text "Designed by xiao3d & blanboom" at 44.1,-46.7 h1.5
Bottom Overlay:
  text "L1" at -49.9,-0.8 h1.2
  text "L2" at 52,-0.8 h1.2

## Text inside footprints (layer, text, board x,y; h text height)
D1: Top Overlay "IR" at -87.8,25.6 h1.2; Top Overlay "+" at -84.2,22.9 h1.2
D2: Top Overlay "IR" at -37.9,25.8 h1.2; Top Overlay "+" at -34.25,22.75 h1.2
D3: Top Overlay "+" at 15.8,22.9 h1.2; Top Overlay "IR" at 12.1,25.5 h1.2
D4: Top Overlay "+" at 65.75,22.75 h1.2; Top Overlay "IR" at 62.1,25.1 h1.2
D5: Top Overlay "IR" at -88.4,-25 h1.2; Top Overlay "+" at -84.25,-27.25 h1.2
D6: Top Overlay "IR" at -38.3,-24.6 h1.2; Top Overlay "+" at -34.25,-27.25 h1.2
D7: Top Overlay "+" at 15.75,-27.25 h1.2; Top Overlay "IR" at 12.1,-24.5 h1.2
D8: Top Overlay "+" at 65.75,-27.25 h1.2; Top Overlay "IR" at 61.4,-24.6 h1.2
D9: Top Overlay "+" at -68.3,22.9 h1.2; Top Overlay "PS" at -64.1,25.4 h1.2
D10: Top Overlay "PS" at -14.1,25.4 h1.2; Top Overlay "+" at -18.2,22.9 h1.2
D11: Top Overlay "PS" at 35.9,25.3 h1.2; Top Overlay "+" at 31.8,22.9 h1.2
D12: Top Overlay "PS" at 86.1,25.4 h1.2; Top Overlay "+" at 81.75,22.75 h1.2
D13: Top Overlay "+" at -68.25,-27.25 h1.2; Top Overlay "PS" at -64,-24.7 h1.2
D14: Top Overlay "PS" at -14.2,-24.6 h1.2; Top Overlay "+" at -18.25,-27.25 h1.2
D15: Top Overlay "PS" at 36,-24.4 h1.2; Top Overlay "+" at 31.75,-27.25 h1.2
D16: Top Overlay "PS" at 86.2,-24.6 h1.2; Top Overlay "+" at 81.75,-27.25 h1.2
D17: Top Overlay "+" at -88.9,35.4 h1.2
D18: Top Overlay "+" at -64,35.25 h1.2
D19: Top Overlay "+" at -88.9,10.4 h1.2
D20: Top Overlay "+" at -63.9,10.4 h1.2
D21: Top Overlay "+" at -38.9,35.5 h1.2
D22: Top Overlay "+" at -13.8,35.5 h1.2
D23: Top Overlay "+" at -38.9,10.4 h1.2
D24: Top Overlay "+" at -13.9,10.4 h1.2
D25: Top Overlay "+" at 11.2,35.4 h1.2
D26: Top Overlay "+" at 36.1,35.5 h1.2
D27: Top Overlay "+" at 11.1,10.4 h1.2
D28: Top Overlay "+" at 36.2,10.4 h1.2
D29: Top Overlay "+" at 61.1,35.4 h1.2
D30: Top Overlay "+" at 86.2,35.4 h1.2
D31: Top Overlay "+" at 61.2,10.5 h1.2
D32: Top Overlay "+" at 86.3,10.4 h1.2
D33: Top Overlay "+" at -88.9,-14.6 h1.2
D34: Top Overlay "+" at -63.8,-14.6 h1.2
D35: Top Overlay "+" at -88.8,-39.6 h1.2
D36: Top Overlay "+" at -63.9,-39.6 h1.2
D37: Top Overlay "+" at -38.9,-14.6 h1.2
D38: Top Overlay "+" at -13.8,-14.6 h1.2
D39: Top Overlay "+" at -38.8,-39.6 h1.2
D40: Top Overlay "+" at -13.8,-39.6 h1.2
D41: Top Overlay "+" at 11.1,-14.6 h1.2
D42: Top Overlay "+" at 36.2,-14.6 h1.2
D43: Top Overlay "+" at 11.1,-39.6 h1.2
D44: Top Overlay "+" at 36.1,-39.6 h1.2
D45: Top Overlay "+" at 61.1,-14.6 h1.2
D46: Top Overlay "+" at 86.1,-14.6 h1.2
D47: Top Overlay "+" at 61.2,-39.6 h1.2
D48: Top Overlay "+" at 86.1,-39.6 h1.2
P1: Top Overlay "GND" at 9.6,35.1 h1.2 r90; Top Overlay "VCC1" at -0.6,34.3 h1.2 r90; Top Overlay "VCC" at -8.3,35.2 h1.2 r90; Top Overlay "VCC" at -5.7,35.1 h1.2 r90; Top Overlay "VCC" at -3.2,35.1 h1.2 r90; Top Overlay "GND" at 7,35.1 h1.2 r90; Top Overlay "SW" at 1.9,36.2 h1.2 r90; Top Overlay "CN" at 4.4,36.2 h1.2 r90
P2: Top Overlay "CN" at 86.3,-4.4 h1.2; Top Overlay "SW" at 86.3,-1.9 h1.2; Top Overlay "GND" at 85.2,-7 h1.2; Top Overlay "VCC" at 85.2,3.2 h1.2; Top Overlay "VCC" at 85.2,5.7 h1.2; Top Overlay "VCC" at 85.2,8.3 h1.2; Top Overlay "VCC1" at 84.4,0.6 h1.2; Top Overlay "GND" at 85.2,-9.5 h1.2
P3: Top Overlay "VCC" at -8.128,-44.976 h1.2 r90; Top Overlay "SW" at 2.1,-44.9 h1.2 r90; Top Overlay "CN" at 4.5,-45 h1.2 r90; Top Overlay "VCC1" at -0.5,-45 h1.2 r90; Top Overlay "GND" at 7.112,-44.976 h1.2 r90; Top Overlay "VCC" at -2.95,-45 h1.2 r90; Top Overlay "VCC" at -5.55,-45 h1.2 r90; Top Overlay "GND" at 9.652,-44.976 h1.2 r90
P4: Top Overlay "GND" at -94.976,-9.652 h1.2; Top Overlay "VCC" at -95,5.55 h1.2; Top Overlay "VCC" at -95,2.95 h1.2; Top Overlay "GND" at -94.976,-7.112 h1.2; Top Overlay "VCC1" at -95,0.5 h1.2; Top Overlay "CN" at -95,-4.5 h1.2; Top Overlay "SW" at -94.9,-2.1 h1.2; Top Overlay "VCC" at -94.976,8.128 h1.2
P7: Bottom Overlay "VCC" at 44.49,-31.9 h1.52 r90; Bottom Overlay "VCC1" at 44.49,-22.9 h1.52 r90; Bottom Overlay "GND" at 44.49,-14.9 h1.52 r90